# EAGLE board DataCollectorV1 v19 (EAGLE 9.7.0)
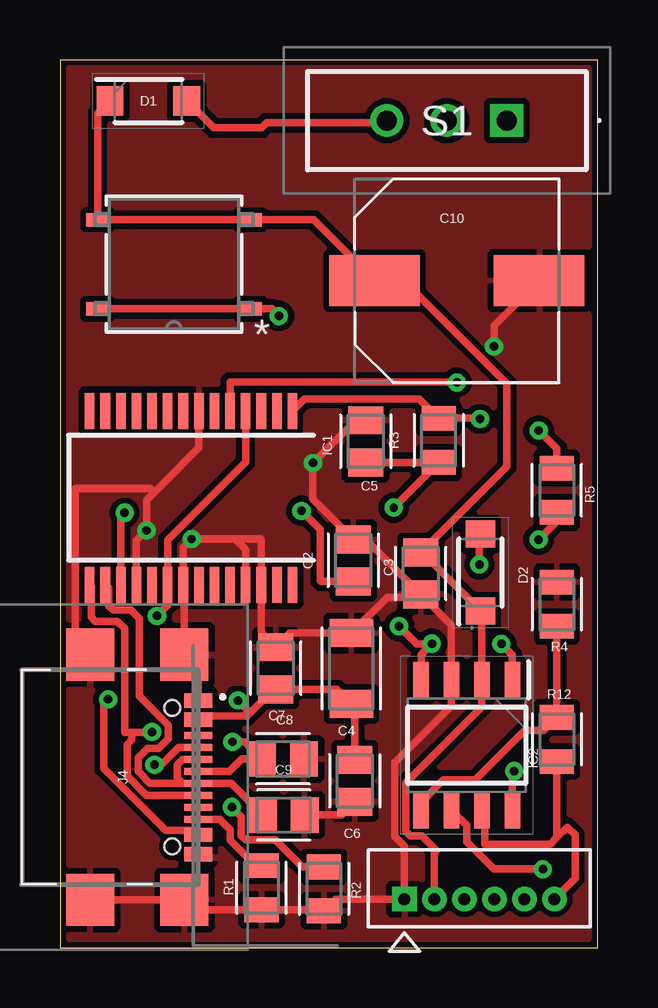
[diagram p0: board, top side]
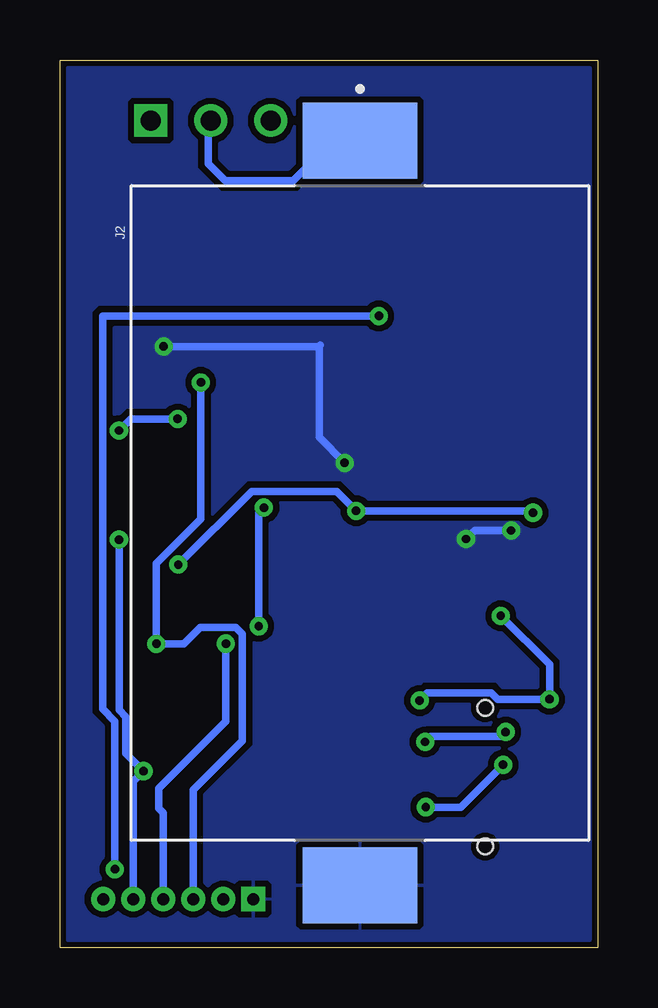
[diagram p1: board, bottom side, seen from below]

Size 22.4 x 37.01 mm. Coordinates in mm from the lower left corner, seen from the top.
Outline: 0,0 22.4,0 22.4,37.01 0,37.01 0,0
Copper layers (1*16): Top / Bottom
Stack-up Default Layer Stack: Top User Defined 0.035mm / Dielectric-1 User Defined 1.5mm / Bottom User Defined 0.035mm
Design rules: minimum copper width 6mil, minimum drill size 0.35mm, copper clearance wire_polygon to wire_polygon 6mil, copper clearance wire_polygon to pad_smd 6mil, copper clearance wire_polygon to via 6mil, copper clearance pad_smd to pad_smd 6mil, copper clearance pad_smd to via 6mil, copper clearance via to via 6mil, copper clearance smd to pad (same net) 6mil, copper clearance smd to via (same net) 6mil, copper clearance smd to smd (same net) 6mil, dimension clearance 6mil, via restrict clearance 0mil, restrict clearance 0mil, drill distance 6mil, keepout clearance 0mil

## Footprints (pad centres in the part's own frame; a part is rotated, then mirrored left to right if it is on the bottom)
CAPC2012X110 = smd 1.165 x 1.465: 1 -0.875,0; 2 0.875,0
CAPC3216X135 = smd 1.165 x 1.815: 1 -1.475,0; 2 1.475,0
CAPAE830X1050N = smd 3.764 x 2.115: 1 -3.426,0; 2 3.426,0
SODFL3718X130N = smd 1.12 x 1.22: 1 -1.6,0; 2 1.6,0
SSOP28 = smd 0.4 x 1.5: 1 -4.225,-3.625; 2 -3.575,-3.625; 3 -2.925,-3.625; 4 -2.275,-3.625; 5 -1.625,-3.625; 6 -0.975,-3.625; 7 -0.325,-3.625; 8 0.325,-3.625; 9 0.975,-3.625; 10 1.625,-3.625; 11 2.275,-3.625; 12 2.925,-3.625; 13 3.575,-3.625; 14 4.225,-3.625; 15 4.225,3.625; 16 3.575,3.625; 17 2.925,3.625; 18 2.275,3.625; 19 1.625,3.625; 20 0.975,3.625; 21 0.325,3.625; 22 -0.325,3.625; 23 -0.975,3.625; 24 -1.625,3.625; 25 -2.275,3.625; 26 -2.925,3.625; 27 -3.575,3.625; 28 -4.225,3.625
SOIC127P600X175-8N = smd 1.525 x 0.65: 1 -2.712,1.905; 2 -2.712,0.635; 3 -2.712,-0.635; 4 -2.712,-1.905; 5 2.712,-1.905; 6 2.712,-0.635; 7 2.712,0.635; 8 2.712,1.905
CON_530470610_MOL = drill 0.5 pad 0.85 square: 1 0,0 | drill 0.5 pad 0.85: 2 -1.25,0; 3 -2.5,0; 4 -3.75,0; 5 -5,0; 6 -6.25,0
796136-1 = smd 3.15 x 4.78: 1 -15.52,0; 2 15.52,0
USB4110GFA = smd 0.3 x 1.15: A1 -3.35,3.678; A4 -2.55,3.678; A5 -1.25,3.678; A6 -0.25,3.678; A7 0.25,3.678; A8 1.25,3.678; A9 2.55,3.678; A12 3.35,3.678; B1 3.05,3.678; B4 2.25,3.678; B5 1.75,3.678; B6 0.75,3.678; B7 -0.75,3.678; B8 -1.75,3.678; B9 -2.25,3.678; B12 -3.05,3.678 | smd 2.18 x 2: MP1 -5.11,-0.827; MP2 5.11,-0.827; MP3 -5.11,3.103; MP4 5.11,3.103 | hole 0.65: -2.89,2.603; 2.89,2.603
RESC2012X65 = smd 1.031 x 1.42: 1 -0.919,0; 2 0.919,0
SLW1166415ASD = drill 0.84 pad 1.365 square: 1 0,0 | drill 0.84 pad 1.365: 2 2.5,0; 3 5,0
SMT_FS = smd 0.953 x 0.559: 1 -3.181,1.854; 2 3.181,1.854; 3 -3.181,-1.854; 4 3.181,-1.854

## Placement (x,y rotation side)
C2  100nF  [CAPC2012X110]  12.22,16.15 90 top
C3  100nF  [CAPC2012X110]  15.04,15.61 270 top
C4  4.7uF x 6.3V  [CAPC3216X135]  12.14,11.64 270 top
C5  1uF  [CAPC2012X110]  12.73,21.12 90 top
C6  100nF  [CAPC2012X110]  12.28,6.96 90 top
C7  10nF  [CAPC2012X110]  8.99,11.66 270 top
C8  47pF  [CAPC2012X110]  9.29,7.87 0 top
C9  47pF  [CAPC2012X110]  9.32,5.54 0 top
C10  [CAPAE830X1050N]  16.53,27.81 0 top
D1  SL1J  [SODFL3718X130N]  3.68,35.31 0 top
D2  SL1J  [SODFL3718X130N]  17.52,15.65 90 top
IC1  FT232RN  [SSOP28]  5.46,18.76 180 top
IC2  STM32C011J6M6  [SOIC127P600X175-8N]  16.95,8.45 270 top
J1  530470610CON_530470610_MOL  [CON_530470610_MOL]  14.35,2.03 180 top
J2  796136-1  [796136-1]  9.91,18.13 270 bottom
J4  USB4110-GF-A  [USB4110GFA]  2.08,7.11 270 top
R1  5k1  [RESC2012X65]  11,2.46 90 top
R2  5k1  [RESC2012X65]  8.39,2.51 270 top
R3  5k1  [RESC2012X65]  15.78,21.16 90 top
R4  NTC10K  [RESC2012X65]  20.7,14.33 90 top
R5  NM  [RESC2012X65]  20.7,19.08 270 top
R12  20k  [RESC2012X65]  20.7,8.69 90 top
S1  SLW-116641-5A-S-D  [SLW1166415ASD]  18.62,34.49 180 top
U1  PTS526_SK15_SMTR2_LFSSMT_FS  [SMT_FS]  4.75,28.5 180 top

## Library data of the parts
C2-C10 = Capacitor; CATEGORY: Capacitor
D1 D2 = SL1J; DESCRIPTION: Rectifier Diode Switching 600V 1A 1000ns 2-Pin SOD-123FL T/R; HEIGHT: 1.3mm; MANUFACTURER_NAME: Diotec; MANUFACTURER_PART_NUMBER: SL1J; MOUSER_PART_NUMBER: 637-SL1J; MOUSER_PRICE-STOCK: https://www.mouser.co.uk/ProductDetail/Diotec-Semiconductor/SL1J?qs=OlC7AqGiEDm%2FUyNJqMVviA%3D%3D
IC1 = IC_Interface; CATEGORY: IC_Interface; MANUFACTURER: FTDI Chip; MPN: FT232RL; OPERATING_TEMP: -40 to 85°C; PART_STATUS: Active; ROHS_COMPLIANT: Compliant; SUB-CATEGORY: Controller; THERMALLOSS: 0.5W; TYPE: USB to UART
IC2 = STM32C011J6M6; DESCRIPTION: Mainstream Arm Cortex-M0+ MCU with 32 Kbytes of Flash memory, 6 Kbytes RAM, 48 MHz CPU, 2x USART, timers, ADC, comm. I/F, 2-3.6V; HEIGHT: 1.75mm; MANUFACTURER_NAME: STMicroelectronics; MANUFACTURER_PART_NUMBER: STM32C011J6M6; MOUSER_PART_NUMBER: 511-STM32C011J6M6; MOUSER_PRICE-STOCK: https://www.mouser.co.uk/ProductDetail/STMicroelectronics/STM32C011J6M6?qs=IPgv5n7u5Qas2LaNYHG%2FbQ%3D%3D
J1 = Library; COPYRIGHT: Copyright (C) 2024 Ultra Librarian. All rights reserved.; MANUFACTURER_PART_NUMBER: 530470610; MFR_NAME: Molex Connector Corporation
J2 = Connectors; CREATED_BY: PCBLayout.com; DIGIKEY_PART_NUMBER: A99327CT-ND; MANUFACTURER: TE Connectivity AMP Connectors; MPN: 796136-1
J4 = USB4110-GF-A; DESCRIPTION: CONN USB 2.0 TYPE-C R/A SMT; HEIGHT: 3.26mm; MANUFACTURER_NAME: GCT (GLOBAL CONNECTOR TECHNOLOGY); MANUFACTURER_PART_NUMBER: USB4110-GF-A; MOUSER_PART_NUMBER: 640-USB4110-GF-A; MOUSER_PRICE-STOCK: https://www.mouser.co.uk/ProductDetail/GCT/USB4110-GF-A?qs=KUoIvG%2F9IlYiZvIXQjyJeA%3D%3D
R1-R5 R12 = Resistor; CATEGORY: Resistor; SUB-CATEGORY: Fixed
S1 = SLW-116641-5A-S-D; ARROW_PART_NUMBER: SLW-116641-5A-S-D; ARROW_PRICE-STOCK: https://www.arrow.com/en/products/slw-116641-5a-s-d/cui-devices?utm_currency=USD&region=nac; DESCRIPTION: 11.6 x 6 x 4.1 mm, 5 mm Raised Slide Actuator, Through Hole, Slide Switch; HEIGHT: 11.3mm; MANUFACTURER_NAME: Same Sky; MANUFACTURER_PART_NUMBER: SLW-116641-5A-S-D; MOUSER_PART_NUMBER: 179-SLW1166415ASD; MOUSER_PRICE-STOCK: https://www.mouser.co.uk/ProductDetail/Same-Sky/SLW-116641-5A-S-D?qs=IKkN%2F947nfBZSdW8n5Vqgw%3D%3D
U1 = 2023-10-17_07-06-43_Library; COPYRIGHT: Copyright (C) 2023 Ultra Librarian. All rights reserved.; MANUFACTURER_PART_NUMBER: PTS526 SK15 SMTR2 LFS; MFR_NAME: C&K Components

## Nets
BAT+: D1.2 S1.3
CC1: J4.A5 R1.2
CC2: J4.B5 R2.1
DN: C9.1 IC1.16 J4.A7 J4.B7
DP: C8.1 IC1.15 J4.A6 J4.B6
GND: C2.2 C3.2 C4.1 C5.2 C6.1 C7.1 C8.2 C9.2 C10.2 IC1.7 IC1.18 IC1.21 IC1.25 IC1.26 IC2.3 J1.1 J2.2 J4.A1 J4.A12 J4.B1 J4.B12 J4.MP1 J4.MP2 J4.MP3 J4.MP4 R1.1 R2.2 R4.2
MEMORY: IC2.6 U1.1 U1.2
NTC: IC2.5 R4.1 R12.2
POS_BAT: J2.1 S1.2
RST: C5.1 IC2.4 J1.4 R3.1
RXD: IC1.1 R3.2 R5.1
SWCLK: IC2.8 J1.5 R5.2
SWDIO: IC2.7 J1.6 R12.1
TXD: IC1.5 IC2.1 J1.3
USB-3V3: C2.1 D2.2 IC1.17
VBUS: C4.2 C6.2 C7.2 IC1.4 IC1.20 J4.A4 J4.A9 J4.B4 J4.B9
VDD: C3.1 C10.1 D1.1 D2.1 IC2.2 J1.2 U1.3 U1.4

## Tracks (layer width: path | path; a pad name or v marks a point on that pad's centre or on a via)
BAT+
  Top 0.305: D1.2 6.4,34.19 8.41,34.19 8.61,34.39 13.52,34.39 S1.3
CC1  (via drill 0.35)
  Top 0.305: v7.16,5.87 7.56,5.47 7.56,4.68 7.74,4.5 8.98,4.5 10.1,3.38 R1.2 | J4.A5 4.96,8.36 4.23,7.63 v3.94,7.63
  Bottom 0.305: v7.16,5.87 5.7,5.87 v3.94,7.63
CC2
  Top 0.305: J4.B5 6.65,5.36 7.1,4.91 7.1,4.49 8.16,3.43 R2.1
DN
  Top 0.305: C9.1 7.85,6.14 7.85,6.15 7.13,6.86 J4.A7 5.11,6.86 | IC1.16 2.03,14.99 2.03,14.26 2.21,14.08 2.94,14.08 3.3,13.73 3.3,10.5 4.51,9.28 4.51,8.72 4.12,8.32 3.65,8.32 3.25,7.92 3.25,7.35 3.75,6.86 5.11,6.86 | 5.11,6.86 4.88,7.09 4.88,7.64 5.11,7.86 J4.B7
DP  (via drill 0.35)
  Top 0.305: J4.A6 7.06,7.36 7.09,7.39 7.57,7.87 C8.1 7.7,8.59 v7.19,8.59 | IC1.15 1.29,15.08 1.29,13.79 1.47,13.62 2.29,13.62 2.38,13.62 2.69,13.31 2.69,8.99 3,8.99 | 3,8.99 3,8.67 2.8,8.47 2.8,7.16 3.6,6.36 J4.B6 | 3,8.99 v3.83,8.99 v3.83,9
  Bottom 0.305: v7.19,8.59 6.96,8.82 4.01,8.82 v3.83,9
GND  (via drill 0.35)
  Top 0.305: 15.16,14.6 C3.2 12.74,17.03 C2.2 10.54,18.71 v10.54,20.22 12.31,21.99 C5.2 | 15.16,14.6 16.31,13.46 IC2.3 16.31,10.09 15.37,9.14 13.96,7.73 13.96,4.66 14.35,4.26 J1.1 11.49,2.03 R1.1 10.96,1.59 R2.2 5.6,1.59 J4.MP4 J4.MP2 | IC1.18 3.19,16.98 v3.61,17.4 3.61,18.67 3.92,18.99 | 7.29,17.04 v5.49,17.04 5.14,16.69 IC1.21 5.19,15.09 J4.MP3 5.38,12.22 5.64,11.96 5.76,11.84 J4.A1 J4.B12 | 7.29,17.04 7.67,16.66 7.74,16.6 IC1.25 | 7.29,17.04 8.36,17.04 8.39,17.01 IC1.26 8.39,13.14 C7.1 9.58,13.12 C4.1 13.62,14.6 15.16,14.6 | IC1.7 5.79,20.85 4.34,19.41 3.92,18.99 | J4.MP1 0.64,12.84 0.64,19.15 3.76,19.15 3.92,18.99 | C9.2 11.73,5.54 C6.1 | C10.2 18.09,25.94 v18.09,25.07 | J4.A12 J4.B1
  Bottom 0.305: v3.61,17.4 5.13,17.4 v5.49,17.04 | v18.09,25.07 11.61,25.07 | 11.56,25.12 11.61,25.07 | 11.61,25.07 11.61,21.29 v10.54,20.22
  pour Bottom (isolate 0.254): 0.15,36.93 22.25,36.93 22.25,0.2 0.15,0.2 0.15,0.1
  pour Top (isolate 0.254): 0.15,36.8 22.28,36.8 22.28,0.15 0.13,0.15 0.13,0.2
MEMORY  (via drill 0.35)
  Top 0.305: U1.2 U1.1 8.81,26.64 v9.12,26.34 | v20.12,3.28 20.09,3.3 18.07,3.3 16.95,4.42 16.95,5.1 IC2.6
  Bottom 0.305: v9.12,26.34 20.62,26.34 20.62,9.96 20.12,9.45 v20.12,3.28
NTC
  Top 0.305: IC2.5 15.04,6.08 15.98,7.01 17.3,7.01 19.36,9.07 20.02,9.07 20.16,9.07 R12.2 R4.1
POS_BAT
  Bottom 0.305: J2.1 11.01,33.65 12.68,31.98 15.52,31.98 16.23,32.69 16.23,34.38 S1.2
RST  (via drill 0.35)
  Top 0.305: IC2.4 15.04,12.22 v15.49,12.68 14.86,12.68 v14.12,13.41 | C5.1 R3.1 15.78,20.22 v13.91,18.35
  Bottom 0.305: J1.4 18.1,5.63 18.29,5.82 18.29,6.66 15.49,9.45 v15.49,12.68 | v14.12,13.41 14.12,18.14 v13.91,18.35
RXD  (via drill 0.35)
  Top 0.305: v17.5,22.05 17.47,22.08 R3.2 14.98,22.88 10.18,22.88 IC1.1 | v19.94,21.57 20.7,20.8 R5.1
  Bottom 0.305: v17.5,22.05 19.46,22.05 v19.94,21.57
SWCLK  (via drill 0.35)
  Top 0.305: IC2.8 18.85,7.29 v18.92,7.37 | R5.2 20.62,18.08 20.62,17.7 v19.94,17.02
  Bottom 0.305: J1.5 19.35,6.94 v18.92,7.37 19.66,8.1 19.66,9.64 19.94,9.92 v19.94,17.02
SWDIO
  Top 0.305: IC2.7 17.7,5.62 17.7,4.32 20.42,4.32 20.7,4.6 | 20.7,4.6 21.14,5.03 21.46,4.7 21.46,3.91 21.46,2.89 J1.6 | 20.7,4.6 R12.1
TXD  (via drill 0.35)
  Top 0.305: v18.39,12.68 18.85,12.21 IC2.1 | IC1.5 7.09,23.6 16.51,23.6 v16.54,23.57
  Bottom 0.305: J1.3 16.85,6.59 14.81,8.64 14.81,13.08 15.09,13.36 16.56,13.36 17.25,12.68 v18.39,12.68 18.39,16.03 16.54,17.88 v16.54,23.57
USB-3V3  (via drill 0.35)
  Top 0.305: IC1.17 2.54,17.98 v2.69,18.14 | C2.1 10.88,15.28 10.85,15.32 10.85,17.43 v10.06,18.22 | v17.48,15.98 17.48,17.2 D2.2
  Bottom 0.305: v2.69,18.14 2.77,18.22 v10.06,18.22 10.88,19.03 14.42,19.03 v17.48,15.98
VBUS  (via drill 0.35)
  Top 0.305: 6.78,9.66 J4.A4 | 6.78,9.66 7.81,9.66 | 7.81,9.66 7.87,9.73 8.93,10.78 C7.2 11.53,10.78 C4.2 12.28,10.03 C6.2 | J4.B9 6.06,9.66 6.78,9.66 | v2.01,10.36 1.83,10.19 1.83,7.48 4.41,4.91 5.72,4.91 J4.B4 J4.A9 | v7.42,10.31 7.81,9.92 7.81,9.66 | v4.04,13.84 4.49,14.29 IC1.20 4.49,17.01 7.74,20.26 IC1.4
  Bottom 0.305: v7.42,10.31 7.1,10.63 4.42,10.63 4.16,10.36 v2.01,10.36 2.01,11.81 v4.04,13.84
VDD
  Top 0.305: D1.1 1.57,34.79 U1.4 U1.3 10.57,30.35 C10.1 14.33,27.81 18.61,23.52 18.61,20.06 C3.1 15.09,16.48 D2.1 17.58,13.99 IC2.2 17.58,10.04 14.41,6.87 14.41,4.85 14.59,4.67 15.07,4.67 15.67,4.06 15.6,4 J1.2